# Altium PCB PCB1.PcbDoc
Units mm, origin at the board's own origin, x right, y up, seen from the top; angles counter-clockwise.
Board outline 20 x 10 mm, 2 copper layers (Top Layer, Bottom Layer), stack 0.78 mm thick; 28 components, 21 nets, 96 pads, 8 vias.
Unrouted connection lines stored in the file: 66.
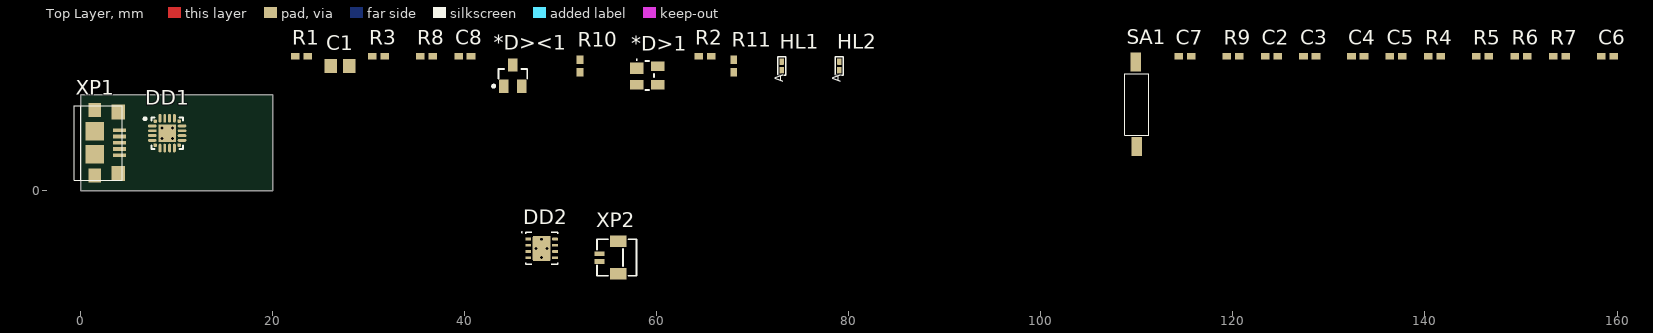
[diagram p0: Top Layer view]
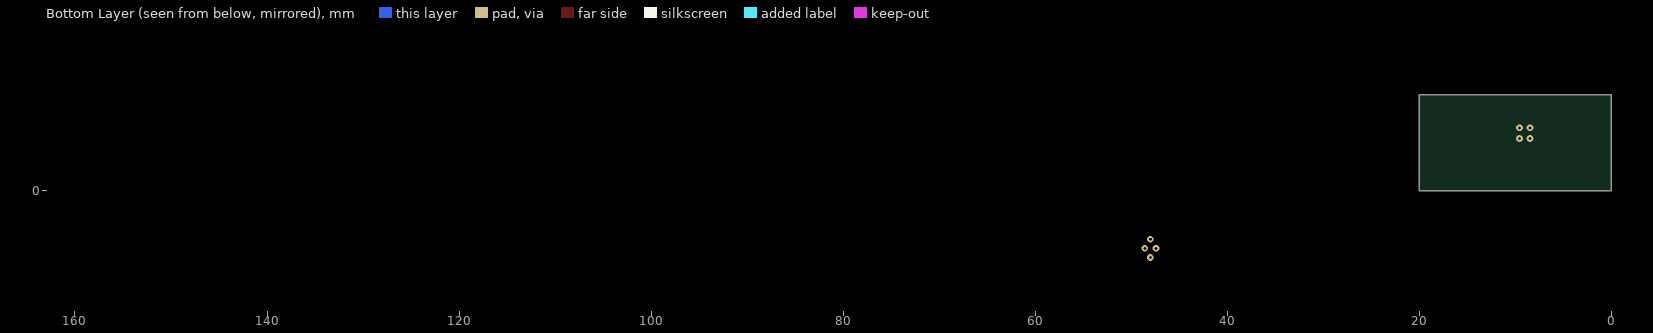
[diagram p1: Bottom Layer view, seen from below]

## Layer stack, top to bottom
Top Solder: solder mask 0.0102, Solder Resist, Dk 3.5
Top Layer: signal copper 0.035
Dielectric 1: dielectric 0.71, FR-4, Dk 4.8
Bottom Layer: signal copper 0.035
Bottom Solder: solder mask 0.0102, Solder Resist, Dk 3.5

## Board outline
0,0 20,0 20,10 0,10

## Design rules (kind name [scope] priority, off if disabled: settings)
Clearance [All] p1: gap=0.2 ignorepadtopadclearanceinfootprint=FALSE except(0.125: Track-Track; 0.25: Arc-Hole Track-Hole SMDPad-Hole THPad-Hole Via-Hole Fill-Hole Poly-Hole Region-Hole Text-Hole)
DiffPairsRouting [All] p1: maxlimit=10 minlimit=0.125 mostfreqgap=0.15 toplayer_minwidth=0.125 toplayer_maxwidth=10 toplayer_prefwidth=0.15 bottomlayer_minwidth=0.125 bottomlayer_maxwidth=10 bottomlayer_prefwidth=0.15 maxuncoupledlength=12.5
HoleSize [All] p1: absolutevalues=TRUE maxlimit=100 minlimit=0.5 maxpercent=80.000 minpercent=20.000
MinimumSolderMaskSliver [All] p1: minsoldermaskwidth=0.15
PlaneClearance [All] p1: clearance=0.25
PolygonConnect [All] p1: connectstyle=Relief reliefconductorwidth=0.254 reliefentries=4 polygonreliefangle="90 Angle" airgapwidth=0.254
RoutingCorners [All] p1: cornerstyle=45-Degree minsetback=2.5 maxsetback=2.5
RoutingVias [All] p1: holewidth=0.3 width=0.7 viastyle="Through Hole" minholewidth=0.3 minwidth=0.7 maxholewidth=10 maxwidth=15
ShortCircuit [All] p1: allowed=TRUE
SilkToSolderMaskClearance [IsPad] p1: minsilkscreentomaskgap=0 clearancetoexposedcopper=TRUE
SolderMaskExpansion [All] p1: expansion=0.102
UnRoutedNet [All] p1: checkbadconnections=TRUE
Width [All] p1: maxlimit=10 minlimit=0.125 preferedwidth=0.15
22 further rules are at their usual default settings.

## Components (designator, comment, footprint, x,y, rotation, side; value= is the part's Value field where it differs from the comment)
*D>1 "Диод лавинный сборка SP0503BAHTG sot-143 Littelfuse" SOT190P237X122-4N 59,12 r0 top
*D><1 "Диод лавинный сборка SM712.TCT sot-23-3 Semtech" SOT95P237X112-3L 45,12 r90 top
C1 "capasistor" CAP0805 27,13 r0 top
C2 "capasistor" CAP0402 124,14 r0 top
C3 "capasistor" CAP0402 128,14 r0 top
C4 "capasistor" CAP0402 133,14 r0 top
C5 "capasistor" CAP0402 137,14 r0 top
C6 "capasistor" CAP0402 159,14 r0 top
C7 "capasistor" CAP0402 115,14 r0 top
C8 "capasistor" CAP0402 40,14 r0 top
DD1 "CP2102N-A01-GQFN20" QFN50P300X300X80_HS-17L 9,6 r0 top
DD2 "SN65HVD78DRB" SON65P300X100_HS-9L 48,-6 r0 top
HL1 "APHHS1005ZGCK" LED0402 73,13 r90 top
HL2 "APHHS1005SYCK" LED0402 79,13 r90 top
R1 "resistor" RES0402 23,14 r0 top
R2 "resistor" RES0402 65,14 r0 top
R3 "resistor" RES0402 31,14 r0 top
R4 "resistor" RES0402 141,14 r0 top
R5 "resistor" RES0402 146,14 r0 top
R6 "resistor" RES0402 150,14 r0 top
R7 "resistor" RES0402 154,14 r0 top
R8 "resistor" RES0402 36,14 r0 top
R9 "resistor" RES0402 120,14 r0 top
R10 "resistor" RES0402 52,13 r90 top
R11 "resistor" RES0402 68,13 r90 top
SA1 "EDS01SGRNTU04Q ( 2319848-1)" SWITCH_TE 110,9 r90 top
XP1 "Гнездо TE connectivity 2174507-2" 2174507-2 0,5 r270 top
XP2 "connector" CONN_JST_SUH_02 55,-6.95 r90 top

## Footprints (in the part's own frame and the unit in brackets; to place one, negate y for a bottom-side part, rotate by r counter-clockwise, add the part's x,y. Pads: shape width x height; smd on the part's side, far side on the other; paste and mask are expansions set on the pad)
2174507-2 [mm] "MICRO USB, TYPE B"
  rect 1.45x1.3 smd mask+0.07: 0(-3.425,1.45) 0(3.425,1.45)
  rect 1.6x1.4 smd mask+0.07: 0(-3.2,3.9) 0(3.2,3.9)
  rect 1.9x1.9 smd mask+0.07: 0(-1.2,1.45) 0(1.2,1.45)
  rect 0.4x1.35 smd mask+0.07: 1(-1.3,4.025) 2(-0.65,4.025) 3(0,4.025) 4(0.65,4.025) 5(1.3,4.025)
  silkscreen extent -3.88,-0.7 3.9,4.3, body extent -3.9,-0.7 3.9,4.3, height 2.68
CAP0402 [mm] "Chip Capacitor, 2-Leads, Body 1,00x0,50mm, IPC High Density"
  rect 0.9x0.7 smd: 1(-0.65,0) 2(0.65,0)
  body extent -0.55,-0.3 0.55,0.3, height 0.6
CAP0805 [mm] "Chip Capacitor, 2-Leads, Body 2,00x1,25mm, IPC High Density"
  rect 1.3x1.5 smd: 1(-0.95,0) 2(0.95,0)
  body extent -1.1,-0.72 1.1,0.72, height 1.1
CONN_JST_SUH_02 [mm] "SM02B-SURS-TF"
  rect 1.2x1.7 smd: 0(-1.7,-0.975) 0(1.7,-0.975)
  rect 0.5x1 smd: 1(-0.4,0.975) 2(0.4,0.975)
  silkscreen extent -1.9,-2.88 1.9,1.22, body extent -1.9,-1.48 1.9,1.22, height 1.71
LED0402 [mm] "1.0 x 0.5 mm SMD Chip LED Lamp"
  rrect50% 0.7x0.5 smd mask+0.07: 1(0.45,0) 2(-0.45,0)
  silkscreen extent -0.95,-0.4 0.95,0.4, body extent -0.5,-0.25 0.5,0.25, height 0.5
QFN50P300X300X80_HS-17L [mm] "QFN, 16-Leads, Body 3,00x3,00mm, Pitch 0,50mm, Thermal Pad 1,80x1,80mm, IPC High Density"
  rrect50% 0.35x0.35 smd mask+0.07: 1(-1.25,1.25) 6(-1.25,-1.25) 11(1.25,-1.25) 16(1.25,1.25)
  oval 0.9x0.3 smd mask+0.07: 2(-1.55,0.75) 3(-1.55,0.25) 4(-1.55,-0.25) 5(-1.55,-0.75) 12(1.55,-0.75) 13(1.55,-0.25) 14(1.55,0.25) 15(1.55,0.75)
  rect 1.8x1.8 smd mask+0.07: 3(0,0)
  oval 0.3x0.9 smd mask+0.07: 7(-0.75,-1.55) 8(-0.25,-1.55) 9(0.25,-1.55) 10(0.75,-1.55) 17(0.75,1.55) 18(0.25,1.55) 19(-0.25,1.55) 20(-0.75,1.55)
  silkscreen extent -2.42,-1.65 1.65,1.65, body extent -1.5,-1.5 1.5,1.5, height 0.8
RES0402 [mm] "Chip Resistor, 2-Leads, Body 1,05x0,54mm, IPC High Density"
  rect 0.9x0.7 smd: 1(-0.65,0) 2(0.65,0)
  body extent -0.55,-0.3 0.55,0.3, height 0.4
SON65P300X100_HS-9L [mm] "SON, 8-Leads, Body 3,00x3,00mm, Pitch 0,65mm, Thermal Pad 2,40x1,49mm, IPC High Density"
  rrect50% 0.6x0.3 smd mask+0.07: 1(-1.4,0.975) 2(-1.4,0.325) 3(-1.4,-0.325) 4(-1.4,-0.975) 5(1.4,-0.975) 6(1.4,-0.325) 7(1.4,0.325) 8(1.4,0.975)
  rrect10% 1.85x2.6 smd mask+0.07: 5(0,0)
  silkscreen extent -2.1,-1.68 1.68,1.72, body extent -1.55,-1.55 1.55,1.55, height 1
SOT95P237X112-3L [mm] "SOT23, 3-Leads, Body 2,92x2,37mm, Pitch 0,95mm, IPC High Density"
  rect 1.4x1 smd: 1(-1.1,0.95) 2(-1.1,-0.95) 3(1.1,0)
  silkscreen extent -1.22,-1.5 0.7,2.12, body extent -1.32,-1.52 1.32,1.52, height 1.12
SOT190P237X122-4N [mm] "SOT143, 4-Leads, Body 2,92x2,37mm, Pitch 1,90mm, IPC Medium Density"
  rect 1.4x1.2 smd: 1(-1.1,0.75)
  rect 1.4x1 smd: 2(-1.1,-0.95) 3(1.1,-0.95) 4(1.1,0.95)
  silkscreen extent -1.15,-1.5 0.7,1.7, body extent -0.85,-1.52 0.85,1.52, height 1.22
SWITCH_TE [mm] "EDS01SGRNTU04Q"
  rect 2x1.1 smd: 1(4.4,0.1) 2(-4.4,0)
  silkscreen extent -3.2,-1.25 3.2,1.25, body extent -4.9,-1.22 4.9,1.22, height 2.8

## Part data
*D>1: library part SP0503BAHTG, "Unidirectional TVS Array", Manufacturer=Littelfuse, Package=sot-143, PowerDissipation="600 Вт", Family="Приборы полупроводниковые", Package/Case=sot-143, PartNumber=SP0503BAHTG, Type1="Диод лавинный сборка"
*D><1: library part SM712.TCT, "TVS Diode for RS-485", Manufacturer=Semtech, Package=sot-23-3, PowerDissipation="600 Вт", Family="Приборы полупроводниковые", Package/Case=sot-23-3, PartNumber=SM712.TCT, Type1="Диод лавинный сборка"
C1: library part CAP, Capacity="0,1 нФ", Manufacturer=Kemet, Package=0805, PartNumber=C0805C101MDRACTU, Tolerance=20%, Voltage="1 кВ"
C2 C4 C6: library part CAP, Capacity="0,1 мкФ", Manufacturer=Murata, Package=0402, PartNumber=GRM033R61A104ME15D, Tolerance=20%, Voltage=10В
C3 C5: library part CAP, Capacity="4.7 мкФ", Manufacturer=Murata, Package=0402, PartNumber=GRM155R61A475MEAAD, Tolerance=20%, Voltage=10В
C7 C8: library part CAP, Capacity="2,2 нФ", Manufacturer=Murata, Package=0402, PartNumber=GRM155R61A222KA01D, Tolerance=10%, Voltage=10В
DD1: "USB-to-UART bridge", Manufacturer="Silicon Laboratories", Package=QFN20, Family="Схемы интегральные", PartNumber=CP2102N-A01-GQFN20, Type1="Преобразователь интерфейсный"
DD2: "RS-485 With IEC ESD Protection", Manufacturer="Texas Instruments", Package=VSON8, Family="Схемы интегральные", PartNumber=SN65HVD78DRB, Type1="Преобразователь интерфейсный"
HL1: "LED GREEN SMD 1.0X0.5MM", Manufacturer=Kingbright, Package=0402, Voltage(V)=2.7, ComponentLink1Description=Параметры, Family="Устройства индикационные и сигнальные", PartNumber=APHHS1005ZGCK
HL2: library part APHHS1005ZGCK, "LED GREEN SMD 1.0X0.5MM", Manufacturer=Kingbright, Package=0402, Voltage(V)=3.0, ComponentLink1Description=Параметры, Family="Устройства индикационные и сигнальные", PartNumber=APHHS1005SYCK
R1: library part RES, Manufacturer=Yageo, Package=0402, PartNumber=RC0402JR-071ML, Tolerance=5%, Resisrance="1 МОм"
R2: library part RES, Manufacturer=Yageo, Package=0402, PartNumber=RL0402FR-070R05L, Tolerance=1%, Resisrance="50 мОм"
R3 R7 R8: library part RES, Manufacturer=Yageo, Package=0402, PartNumber=RC0402JR-0710KL, Tolerance=5%, Resisrance="10 кОм"
R4: library part RES, Manufacturer=Yageo, Package=0402, PartNumber=RC0402JR-071KL, Tolerance=5%, Resisrance="1 кОм"
R5: library part RES, Manufacturer=Yageo, Package=0402, PartNumber=RC0402JR-0730RL, Tolerance=5%, Resisrance="30 Ом"
R6: library part RES, Manufacturer=Yageo, Package=0402, PartNumber=RC0402JR-07130RL, Tolerance=5%, Resisrance="130 Ом"
R9 R10: library part RES, Manufacturer=Yageo, Package=0402, PartNumber=RC0402JR-0710RL, Tolerance=5%, Resisrance="10 Ом"
R11: library part RES, Manufacturer=Yageo, Package=0402, PartNumber=RC0402JR-07120RL, Tolerance=5%, Resisrance="120 Ом"
SA1: library part EDS01SGRNTU04Q, "Dip-switch", Manufacturer=TE, Package=DIP, ComponentLink1URL="d:\WORK\Altium\Projects\2017-02-01_Prj\DataSheets\IT-1184 Series.pdf", Family="Устройства коммутационные в цепях управления, сигнализации и измерительных", PartNumber="EDS01SGRNTU04Q ( 2319848-1)", Type1="Выключатель движковый модульный"
XP1: library part "MICRO USB, TYPE B", "MICRO USB, TYPE B", Manufacturer="TE connectivity", PartNumber=2174507-2, Family="Соединения контактные", Type1=Гнездо
XP2: library part CONN_02P, "2 pin", Manufacturer=JST, PartNumber=SM02B-SURS-TF

## Via types
v1: diameter 0.7, hole 0.3, Top Layer to Bottom Layer, tented bottom, 4 vias
v2: diameter 0.7, hole 0.3, Top Layer to Bottom Layer, 4 vias

## Nets (pads, with @x,y where several pads share a name; then routed paths per layer and width w, separated by ;. In a path a pad name is that pad's centre, name@x,y a point inside that pad or via, vN(x,y) a via of type N, cw(c..) or ccw(c..) an arc to the next point about the centre after c; other vN are vias at no path point)
GND: *D>1.1 *D><1.3 C1.1 C2.1 C3.1 C4.1 C5.1 C6.1 C7.1 C8.2 DD1.3 DD1.12 DD2.5 R1.1 R3.1 R8.1 XP1.5
  other v1: 48,-6.95 47.425,-6 48.575,-6 48,-5.05
  other v2: 8.45,5.45 9.55,5.45 8.45,6.55 9.55,6.55
Net*D>1_2: *D>1.2 R2.2 XP1.1
Net*D>1_3: *D>1.3 DD1.5 XP1.2
Net*D>1_4: *D>1.4 DD1.4 XP1.3
Net*D><1_1: *D><1.1 R10.1 R11.2 XP2.2
Net*D><1_2: *D><1.2 R9.1 SA1.2 XP2.1
NetC1_2: C1.2 R1.2 XP1.0
NetC2_2: C2.2 C3.2 DD1.7 DD1.8 R2.1
NetC4_2: C4.2 C5.2 C6.2 DD1.6 DD2.8 R4.2 R5.2 R6.2 R7.2
NetC7_2: C7.2 DD2.7 R9.2
NetC8_1: C8.1 DD2.6 R10.2
NetDD1_1: DD1.1 DD2.2 DD2.3 R8.2
NetDD1_9: DD1.9 R4.1
NetDD1_11: DD1.11 R3.2
NetDD1_17: DD1.17 DD2.1 R7.1
NetDD1_18: DD1.18 DD2.4
NetDD1_19: DD1.19 HL1.1
NetDD1_20: DD1.20 HL2.1
NetHL1_2: HL1.2 R5.1
NetHL2_2: HL2.2 R6.1
NetR11_1: R11.1 SA1.1
pads on no net: DD1.2 DD1.10 DD1.13 DD1.14 DD1.15 DD1.16 XP1.4 XP2.0

## Silkscreen, mask and mechanical layers (free items; w line width, h text height)
Mechanical 1:
  the board outline again, w0.2

## Text inside footprints (layer, text, board x,y; h text height)
HL1: Top Overlay "A" at 73.475,11.325 h1.52 r90
HL2: Top Overlay "A" at 79.475,11.325 h1.52 r90